# Altium PCB 海关全向控制器主控板电路V3.PcbDoc (part 1 of 3)
Units mil, origin at the board's own origin, x right, y up, seen from the top; angles counter-clockwise.
Board outline 7874.02 x 2362.2 mil, 2 copper layers (Top Layer, Bottom Layer), stack 42.17 mil thick; 192 components, 119 nets, 573 pads, 115 vias.
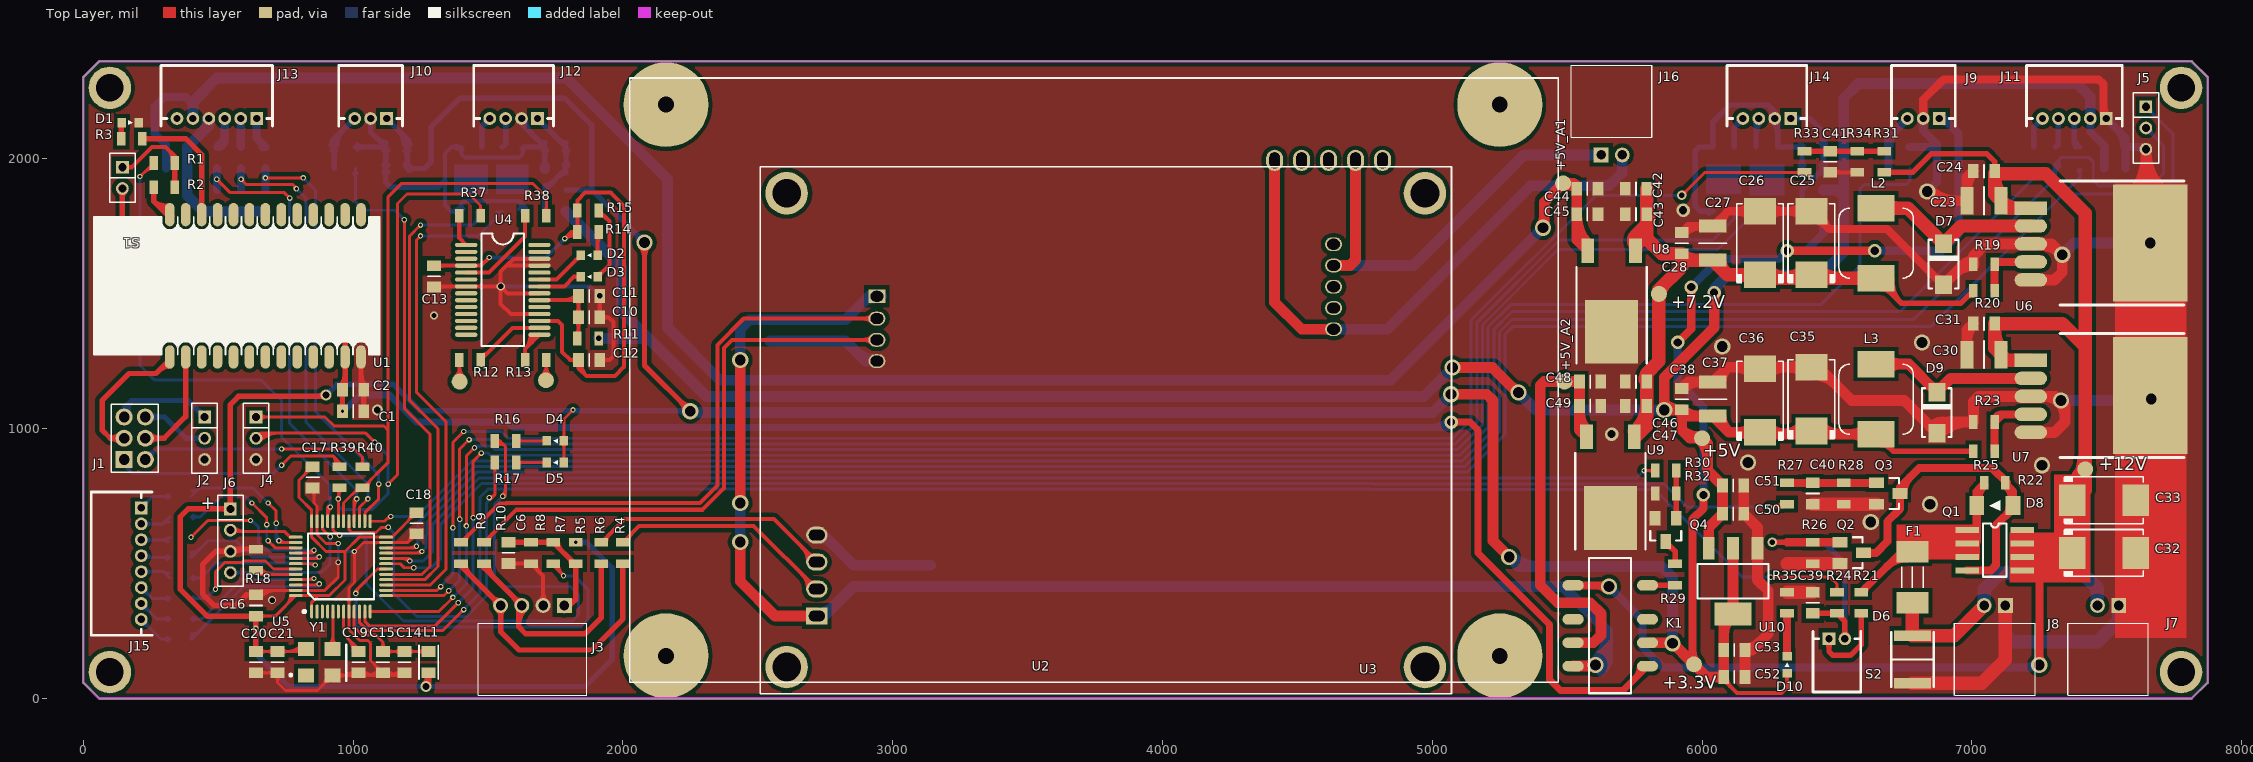
[diagram p0: Top Layer view]
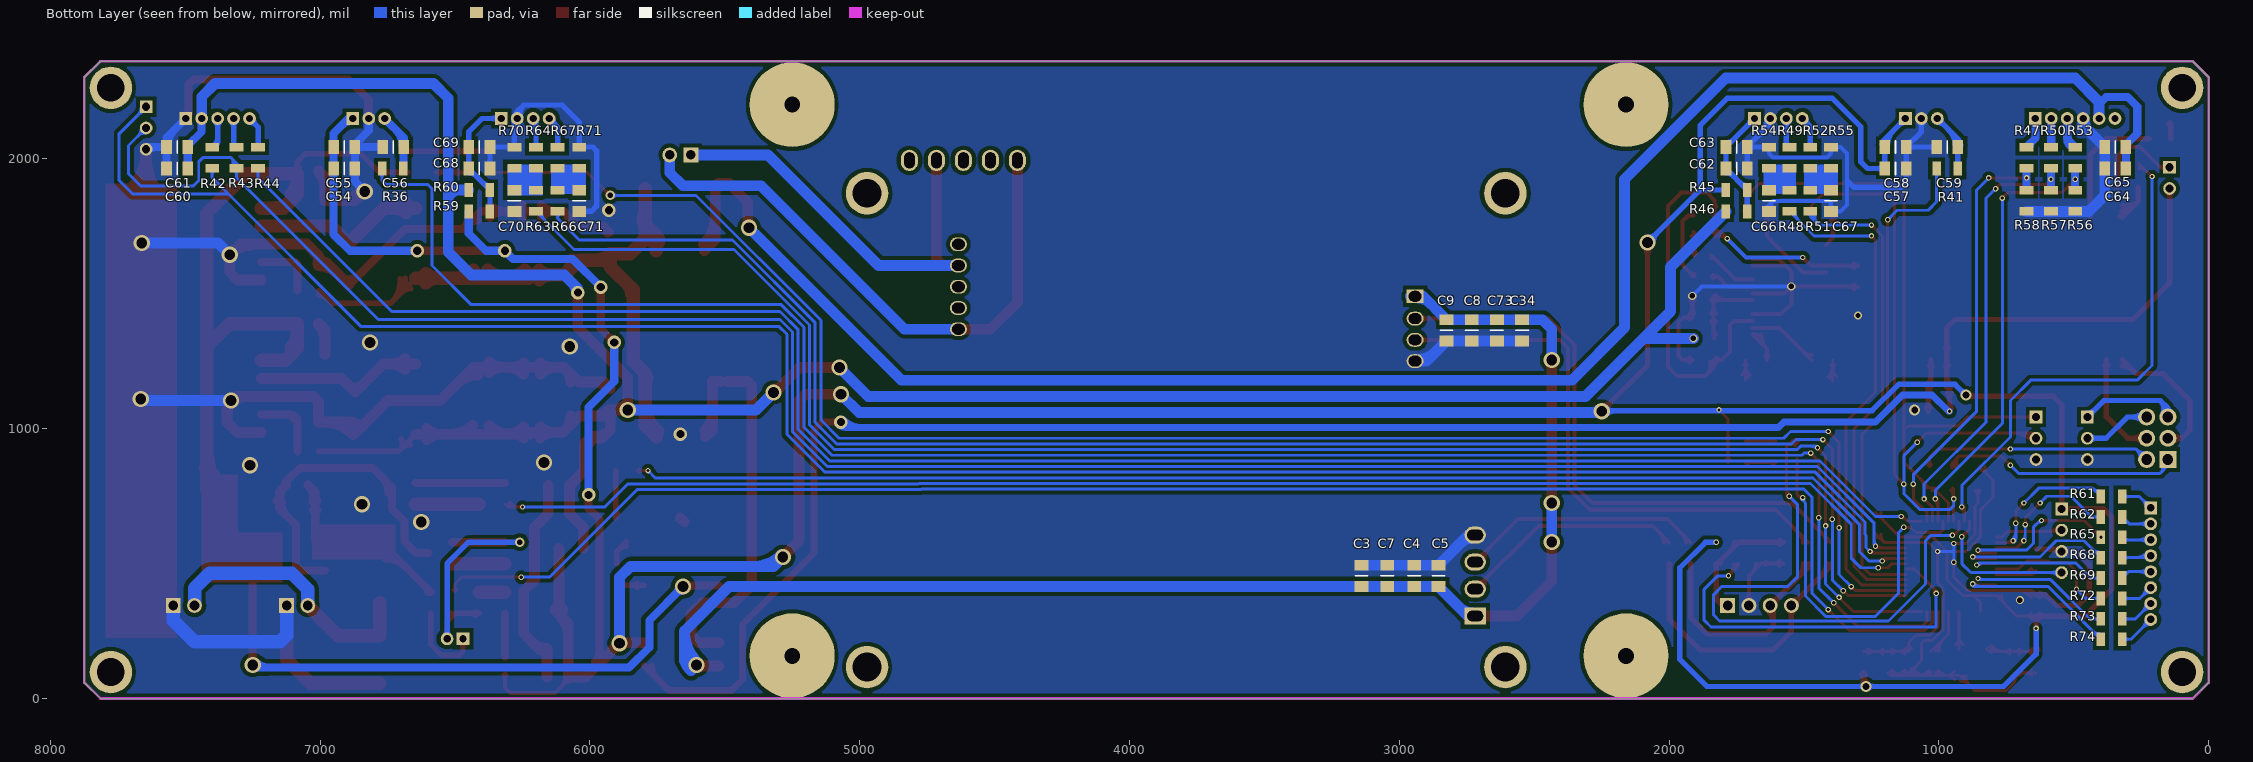
[diagram p1: Bottom Layer view, seen from below]
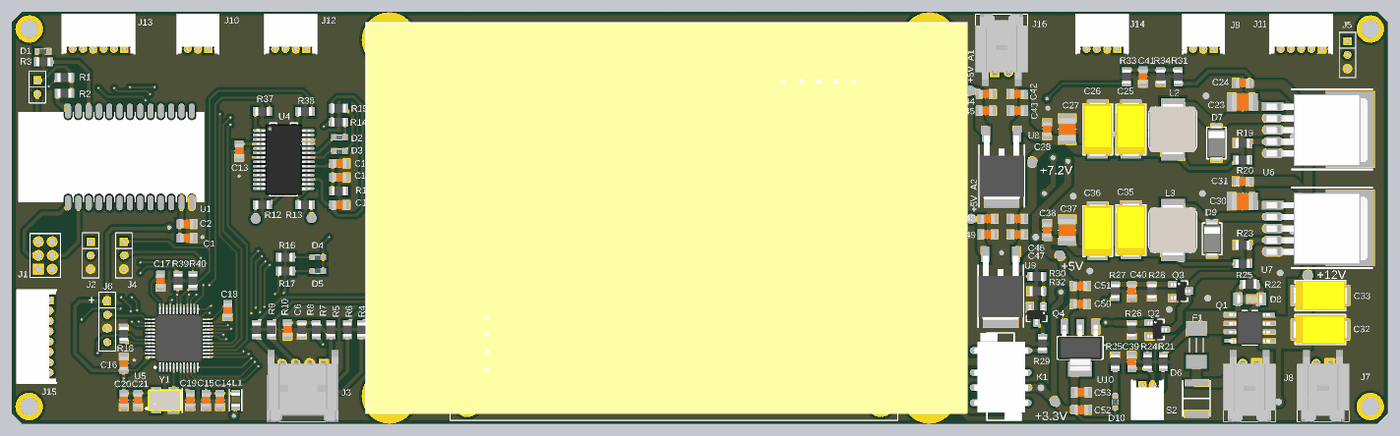
[diagram p4: 3D render of the assembled board from above, using the file's embedded part models]
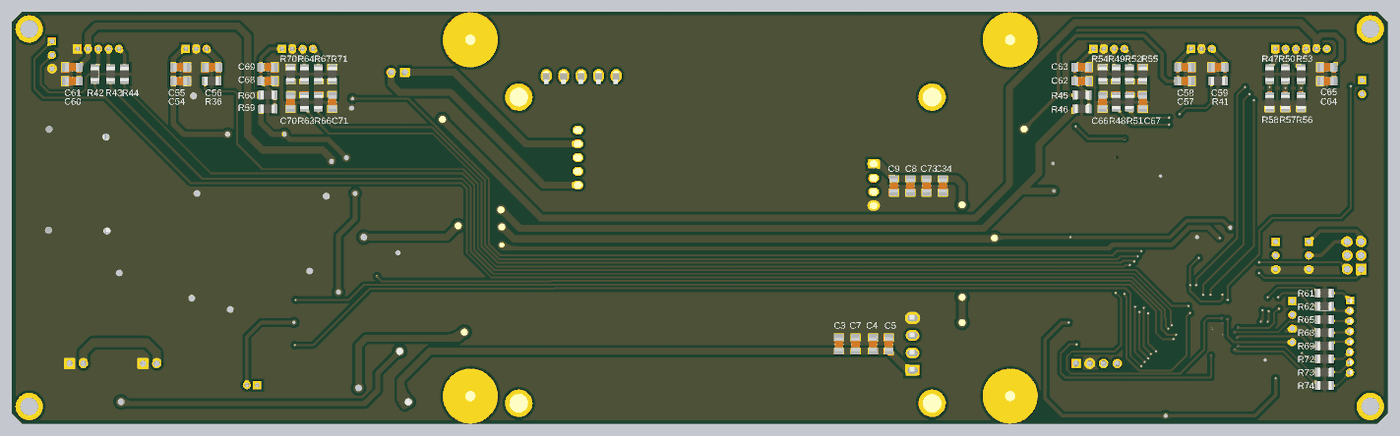
[diagram p5: 3D render of the assembled board from below, using the file's embedded part models]

## Layer stack, top to bottom
Top Solder: solder mask 0.4, Solder Resist, Dk 3.5
Top Layer: signal copper 1.4
Dielectric 1: dielectric 39.3701, FR-4, Dk 4.8
Bottom Layer: signal copper 1.4
Bottom Solder: solder mask 0.4, Solder Resist, Dk 3.5

## Board outline
0,59.06 0,2303.15 59.06,2362.2 7814.96,2362.2 7874.02,2303.15 7874.02,59.05 7814.96,0 59.06,0

## Design rules (kind name [scope] priority, off if disabled: settings)
Clearance [All] p1: gap=6
ComponentClearance [All] p1: gap=0 collisioncheckmode=3 verticalgap=0 showdistances=FALSE
DiffPairsRouting [All] p1: maxlimit=10 minlimit=10 mostfreqgap=10 toplayer_minwidth=15 toplayer_maxwidth=15 toplayer_prefwidth=15 bottomlayer_minwidth=15 bottomlayer_maxwidth=15 bottomlayer_prefwidth=15 maxuncoupledlength=500
Height [All] p1: minheight=0 maxheight=2000 prefheight=500
HoleSize [All] p1: absolutevalues=TRUE maxlimit=200 minlimit=1 maxpercent=80.000 minpercent=20.000
HoleToHoleClearance [All] p1: gap=6 allowstackedmicrovias=TRUE
MinimumSolderMaskSliver [All] p1: minsoldermaskwidth=0
PlaneConnect [All] p1: planeconnectstyle=Direct reliefexpansion=20 reliefentries=4 reliefconductorwidth=10 reliefairgap=10
PolygonConnect [All] p1: connectstyle=Direct reliefconductorwidth=10 reliefentries=4 polygonreliefangle="90 Angle" airgapwidth=10
RoutingVias [All] p1: holewidth=28 width=50 viastyle="Through Hole" minholewidth=8 minwidth=12 maxholewidth=200 maxwidth=300
SilkToSilkClearance [All] p1: silktosilkclearance=0
SilkToSolderMaskClearance [IsPad] p1: minsilkscreentomaskgap=0 clearancetoexposedcopper=TRUE
SolderMaskExpansion [All] p1: expansion=4
Width [All] p1: maxlimit=157.48 minlimit=10 preferedwidth=10
20 further rules are at their usual default settings.

## Classes and differential pairs
component class Designator: C23 C24 C25 C26 C27 C28 C30 C31 C32 C33 C35 C36 C37 C38 C39 C40 C41 C42 C43 C44 C45 C46 C47 C48 C49 C50 C51 C52 C53 D6 D7 D8 D9 D10 F1 J7 J8 K1 L2 L3 Q1 Q2 Q3 Q4 R19 R20 R21 R22 R23 R24 R25 R26 R27 R28 R29 R30 R31 R32 R33 R34 R35 S2 U6 U7 U8 U9 U10
component class 海关全向控制器主控板电路V3_系统管理: C54 C55 C56 C57 C58 C59 C60 C61 C62 C63 C64 C65 C66 C67 C68 C69 C70 C71 J9 J10 J11 J12 J13 J14 J15 R36 R37 R38 R39 R40 R41 R42 R43 R44 R45 R46 R47 R48 R49 R50 R51 R52 R53 R54 R55 R56 R57 R58 R59 R60 R61 R62 R63 R64 R65 R66 R67 R68 R69 R70 R71 R72 R73 R74
differential pair V2: +V2_P -V2_N
differential pair V1: +V1_P -V1_N

## Components (designator, comment, footprint, x,y, rotation, side; value= is the part's Value field where it differs from the comment)
C1 "10uF" C0805 1000,1065 r0 top
C2 "0.1uF" C0805 1000,1145 r180 top
C3 "10uF" C0805 3140,455 r90 bottom
C4 "1uF" C0805 2945,455 r90 bottom
C5 "0.1uF" C0805 2855,455 r270 bottom
C6 "0.1uF" C0805 1576,540 r270 top
C7 "10uF" C0805 3045,455 r90 bottom
C8 "1uF" C0805 2731.67,1365 r270 bottom
C9 "0.1uF" C0805 2825,1365 r90 bottom
C10 "10uF" C0805 1875,1413.29 r0 top
C11 "0.1uF" C0805 1875,1492.44 r180 top
C12 "0.1uF" C0805 1875,1255 r180 top
C13 "0.1uF" C0805 1300,1565 r270 top
C14 "10uF" C0805 1190.77,135 r90 top
C15 "0.1uF" C0805 1110.39,135 r270 top
C16 "0.1uF" C0805 640,345 r90 top
C17 "0.1uF" C0805 850,820 r270 top
C18 "0.1uF" C0805 1235,650 r270 top
C19 "0.1uF" C0805 1020,135 r270 top
C20 "10uF" C0805 640,135 r90 top
C21 "10uF" C0805 720,135 r90 top
C23 "22uF" C1210 7045,1845 r180 top
C24 "0.1uF" C0805 7045,1955 r0 top
C25 "100uF/25V" C7343 6405,1688.33 r90 top
C26 "100uF/25V" C7343 6215,1688.33 r90 top
C27 "22uF" C1210 6040,1688.33 r90 top
C28 "0.1uF" C0805 5925,1688.33 r270 top
C30 "22uF" C1210 7045,1275 r180 top
C31 "0.1uF" C0805 7045,1390 r0 top
C32 "100uF/25V" C7343 7490,540 r0 top
C33 "100uF/25V" C7343 7490,735 r0 top
C34 "10uF" C0805 2545,1365 r270 bottom
C35 "100uF/25V" C7343 6405,1110 r90 top
C36 "100uF/25V" C7343 6215,1105 r90 top
C37 "22uF" C1210 6040,1110 r90 top
C38 "0.1uF" C0805 5925,1110 r270 top
C39 "0.1uF" C0805 6410,355 r270 top
C40 "0.1uF" C0805 6410,760.02 r90 top
C41 "0.1uF" C0805 6475,1990 r90 top
C42 "10uF" C0805 5755,1890 r180 top
C43 "0.1uF" C0805 5755,1795 r0 top
C44 "10uF" C0805 5575,1890 r0 top
C45 "0.1uF" C0805 5575,1795 r180 top
C46 "10uF" C0805 5755,1175 r180 top
C47 "0.1uF" C0805 5755,1085 r0 top
C48 "10uF" C0805 5585,1175 r0 top
C49 "0.1uF" C0805 5585,1085 r180 top
C50 "10uF" C0805 6115,685 r0 top
C51 "0.1uF" C0805 6115,790 r180 top
C52 "10uF" C0805 6120,80 r0 top
C53 "0.1uF" C0805 6120,180 r180 top
C54 "10uF" C0805 6910.8,1964.79 r180 bottom
C55 "0.1uF" C0805 6910.8,2044.37 r180 bottom
C56 "0.1uF" C0805 6729.2,2044.37 r0 bottom
C57 "10uF" C0805 1160.8,1964.79 r180 bottom
C58 "0.1uF" C0805 1160.8,2044.37 r180 bottom
C59 "0.1uF" C0805 969.2,2044.37 r0 bottom
C60 "10uF" C0805 7530,1964.79 r0 bottom
C61 "0.1uF" C0805 7530,2044.37 r0 bottom
C62 "0.1uF" C0805 1750,1964.79 r0 bottom
C63 "10uF" C0805 1750,2044.37 r0 bottom
C64 "10uF" C0805 346.36,1964.79 r0 bottom
C65 "0.1uF" C0805 346.36,2044.37 r0 bottom
C66 "0.1uF" C0805 1630,1845 r270 bottom
C67 "0.1uF" C0805 1400,1845 r270 bottom
C68 "0.1uF" C0805 6410,1964.79 r0 bottom
C69 "10uF" C0805 6410,2044.37 r0 bottom
C70 "0.1uF" C0805 6280,1845 r270 bottom
C71 "0.1uF" C0805 6040,1845 r270 bottom
C73 "10uF" C0805 2638.33,1365 r270 bottom
D1 "LED" LED0603 175,2135 r0 top
D2 "LED" LED0603 1875,1642.86 r180 top
D3 "LED" LED0603 1875,1563.72 r180 top
D4 "LED" LED0603 1750,955 r180 top
D5 "LED" LED0603 1750,875 r180 top
D6 "BA301N" BA301N 6780,145 r270 top
D7 "SS14" SMA 6895,1610 r90 top
D8 "ZMM16" SOD-80-S 7085,715 r180 top
D9 "SS14" SMA 6870,1060 r90 top
D10 "LED" LED0603 6315,125 r90 top
F1 "5A不可恢复保险" F1808 6780,450 r90 top
J1 "Jack 2x3" Jk2*3-2.0 151.26,886.26 r90 top
J2 "Jack 1x3" Jk1*3-2.0 450,965 r270 top
J3 "Jack 1x4" 35363-0460 1665,345 r0 top
J4 "Jack 1x3" Jk1*3-2.0 640,965 r270 top
J5 "Jack 1x3" Jk1*3-2.0 7645,2115 r270 top
J6 "Jack 1x4" Jk1*4-2.0 545,585 r270 top
J7 "Jack 1x2" 35363-0260 7505,345 r0 top
J8 "Jack 1x2" 35363-0260 7085,345 r0 top
J9 "Jack 1x3" ZH-3AWD 6820,2150 r180 top
J10 "Jack 1x3" ZH-3AWD 1065,2150 r180 top
J11 "Jack 1x5" ZH-5AWD 7380,2150 r180 top locked
J12 "Jack 1x4" ZH-4AWD 1595,2150 r180 top
J13 "Jack 1x6" ZH-6AWD 495,2150 r180 top
J14 "Jack 1x4" ZH-4AWD 6240,2150 r180 top locked
J15 "Jack 1x8" ZH-8AWD 215,500 r270 top
J16 "Jack 1x2" 35363-0260 5665,2015 r180 top
K1 "G6K-2F-Y" G6K-2F-Y 5660,270 r270 top
L1 "1uH" L0805 1280,135 r90 top
L2 "33uH" L6.6*7.1mm 6645,1688.33 r270 top
L3 "33uH" L6.6*7.1mm 6645,1110 r270 top
Q1 "FDS4435" SO8 7085,550 r0 top
Q2 "S8050" SOT-23 6555,540 r270 top
Q3 "S8050" SOT-23 6690,760 r270 top
Q4 "S8050" SOT-23 5865,625 r180 top
R1 "1K" R0805 300,1985 r180 top
R2 "1K" R0805 300,1895 r180 top
R3 "1K" R0805 180,2075 r0 top
R4 "0R" R0805 2000,540 r90 top
R5 "1K" R0805 1825,540 r270 top
R6 "0R" R0805 1920,540 r90 top
R7 "1K" R0805 1742,540 r90 top
R8 "10K" R0805 1659,540 r270 top
R9 "0R" R0805 1400,540 r90 top
R10 "0R" R0805 1485,540 r90 top
R11 "NC" R0805 1871.06,1334.15 r0 top
R12 "0R" R0805 1432.95,1255 r180 top
R13 "0R" R0805 1677.05,1255 r0 top
R14 "1K" R0805 1871.06,1729.88 r0 top
R15 "1K" R0805 1871.06,1809.03 r0 top
R16 "1K" R0805 1565,955 r0 top
R17 "1K" R0805 1565,875 r0 top
R18 "100K" R0805 640,515 r270 top
R19 "2K" R0805 7045,1610 r180 top
R20 "10K" R0805 7045,1511.92 r0 top
R21 "500k" R0805 6590,355 r90 top
R22 "10k" R0805 7085,800 r180 top
R23 "3.3K" R0805 7045,1025 r180 top
R24 "1K" R0805 6500,355 r270 top
R25 "10K" R0805 7045,916.92 r0 top
R26 "200K" R0805 6410,540 r270 top
R27 "1K" R0805 6315,760.02 r90 top
R28 "10K" R0805 6525,760.02 r270 top
R29 "0R" R0805 5900,460 r270 top
R30 "1K" R0805 5865,845 r0 top
R31 "10K" R0805 6675,1990 r90 top
R32 "10K" R0805 5865,760 r180 top
R33 "1K" R0805 6380,1990 r90 top
R34 "1K" R0805 6575,1990 r90 top
R35 "1K" R0805 6315,355 r270 top
R36 "1K" R0805 6731.17,1964.79 r180 bottom
R37 "NC" R0805 1432.95,1790 r180 top
R38 "NC" R0805 1677.05,1790 r180 top
R39 "0R" R0805 950,820 r90 top
R40 "0R" R0805 1035,820 r90 top
R41 "1K" R0805 969.2,1964.79 r180 bottom
R42 "0R" R0805 7400,2005 r270 bottom
R43 "0R" R0805 7310,2005 r270 bottom
R44 "0R" R0805 7230,2005 r270 bottom
R45 "0R" R0805 1750,1885.21 r180 bottom
R46 "NC" R0805 1750,1805.63 r180 bottom
R47 "1K" R0805 675,2005 r270 bottom
R48 "1K" R0805 1553.33,1845 r270 bottom
R49 "1K" R0805 1553.33,2005 r90 bottom
R50 "1K" R0805 585,2005 r270 bottom
R51 "1K" R0805 1476.67,1845 r270 bottom
R52 "1K" R0805 1476.67,2005 r90 bottom
R53 "1K" R0805 495,2005 r270 bottom
R54 "NC" R0805 1630,2005 r90 bottom
R55 "NC" R0805 1400,2005 r270 bottom
R56 "10K" R0805 495,1845 r90 bottom
R57 "10K" R0805 585,1845 r90 bottom
R58 "10K" R0805 675,1845 r90 bottom
R59 "0R" R0805 6410,1805.63 r180 bottom
R60 "NC" R0805 6410,1885.21 r180 bottom
R61 "1K" R0805 360,749.03 r0 bottom
R62 "0R" R0805 360,673.45 r0 bottom
R63 "1K" R0805 6200,1845 r270 bottom
R64 "1K" R0805 6200,2005 r90 bottom
R65 "1K" R0805 360,597.88 r0 bottom
R66 "1K" R0805 6120,1845 r270 bottom
R67 "1K" R0805 6120,2005 r90 bottom
R68 "0R" R0805 360,522.3 r0 bottom
R69 "1K" R0805 360,446.73 r0 bottom
R70 "NC" R0805 6280,2005 r90 bottom
R71 "NC" R0805 6040,2005 r270 bottom
R72 "0R" R0805 360,371.15 r0 bottom
R73 "1K" R0805 360,295.58 r0 bottom
R74 "0R" R0805 360,220 r0 bottom
S1 "SW-PB" Jk1*2-2.0 145,1930 r270 top
S2 "SW-PB" ZH-2AWD 6500,221.45 r0 top locked
U1 "HC-05" HC-05 675,1530 r90 top
U2 "USB-AV" USB-AV 3705,1180 r180 top locked
U3 "miniUSB-AV" MINIUSB-AV 3790,995 r180 top locked
U4 "FT232RL" SSOP-28 1555,1515 r0 top
U5 "STM32F103CB" LQF48 955,490 r90 top locked
U6 "LM2596-ADJ" TO-263-5 7440,1685 r270 top locked
U7 "LM2596-ADJ" TO-263-5 7440,1120 r270 top locked
U8 "78M05" TO-252 5665,1510 r180 top
U9 "78M05" TO-252 5660,820 r180 top
U10 "LM1117-3.3" SOT-223 6115,435 r180 top
Y1 "XTAL 8MHz" XTAL5032 875,135 r0 top

## Footprints (in the part's own frame and the unit in brackets; to place one, negate y for a bottom-side part, rotate by r counter-clockwise, add the part's x,y. Pads: shape width x height; smd on the part's side, far side on the other; paste and mask are expansions set on the pad)
35363-0260 [mm]
  rect 1.4x1.4 hole 0.9: 1(1,0)
  round 1.4 hole 0.9: 2(-1,0)
  silkscreen extent -3.8,-8.46 3.8,-1.67, body extent -3.86,-8.52 3.84,1.98, height 5.75
35363-0460 [mm]
  rect 1.4x1.4 hole 0.9: 1(3,0)
  round 1.4 hole 0.9: 2(1,0) 3(-1,0) 4(-3,0)
  silkscreen extent -5.11,-8.46 5.1,-1.67, body extent -5.15,-8.52 5.15,1.98, height 5.75
BA301N [mm]
  rect 1x3.5 smd: 1(-2.25,0) 2(2.25,0)
  silkscreen extent -2.6,-2 2.6,2
C0805 [mm]
  rect 1x1.3 smd: 1(-1,0) 2(1,0)
  silkscreen extent 0,-0.6 0,0.6, body extent -1,-0.63 1,0.63, height 0.8
C1210 [mm]
  rect 1.2x2.6 smd: 1(-1.6,0) 2(1.6,0)
  silkscreen extent 0,-1.3 0,1.3, body extent -1.6,-1.25 1.6,1.25, height 0.95
C7343 [mm] "100uF/25V"
  rect 2.5x3 smd: 1(-3,0) 2(3,0)
  silkscreen extent -3.8,-2.2 3.7,2.2, body extent -3.87,-2.15 3.87,2.15, height 2.9
F1808 [mm]
  rect 2x3 smd: 1(-2.4,0) 2(2.4,0)
  silkscreen extent -1,-1 1,1
G6K-2F-Y [mm]
  oval 1x2 smd: 1(-3.8,-3.5) 2(-0.6,-3.5) 3(1.6,-3.5) 4(3.8,-3.5) 5(3.8,3.5) 6(1.6,3.5) 7(-0.6,3.5) 8(-3.8,3.5)
  silkscreen extent -6.37,-2.01 6.36,1.95, body extent -6.36,-3.83 6.44,3.97, height 5.4
HC-05 [mm] "HC-05 蓝牙串口通信模块"
  oval 2.2x0.9 smd: 1(-6.7,9) 2(-6.7,7.5) 3(-6.7,6) 4(-6.7,4.5) 5(-6.7,3) 6(-6.7,1.5) 7(-6.7,0) 8(-6.7,-1.5) 9(-6.7,-3) 10(-6.7,-4.5) 11(-6.7,-6) 12(-6.7,-7.5) 13(-6.7,-9) 22(6.7,-9) 23(6.7,-7.5) 24(6.7,-6) 25(6.7,-4.5) 26(6.7,-3) 27(6.7,-1.5) 28(6.7,0) 29(6.7,1.5) 30(6.7,3) 31(6.7,4.5) 32(6.7,6) 33(6.7,7.5) 34(6.7,9)
  silkscreen extent -6.5,-10.75 6.5,16.15
Jk1*2-2.0 [mm]
  rect 1.2x1.2 hole 0.762: 1(-1,0)
  round 1.2 hole 0.762: 2(1,0)
  silkscreen extent -2.3,-1.2 2.3,1.2
Jk1*3-2.0 [mm]
  rect 1.2x1.2 hole 0.762: 1(-2,0)
  round 1.2 hole 0.762: 2(0,0) 3(2,0)
  silkscreen extent -3.3,-1.2 3.3,1.2
Jk1*4-2.0 [mm] "4P，直插，2.0mm间距，排母"
  rect 1.2x1.2 hole 0.762: 1(-3,0)
  round 1.2 hole 0.762: 2(-1,0) 3(1,0) 4(3,0)
  silkscreen extent -4.3,-1.2 4.3,1.2, body extent -4.25,-1.22 4.25,1.18, height 4.3
Jk2*3-2.0 [mm] "2.0双排座2*3-直"
  rect 1.6x1.6 hole 1: 1(0,0)
  round 1.6 hole 1: 2(0,-2) 3(2,0) 4(2,-2) 5(4,0) 6(4,-2)
  silkscreen extent -1.2,-3.2 5.2,1.2, body extent -1.03,-3.26 4.98,1.25, height 4.4
L6.6*7.1mm [mm] "AMPI0630ED"
  rect 2.5x3.5 smd: 1(-3.3,0) 2(3.3,0)
  silkscreen extent -3.3,-3.5 3.3,3.5, body extent -3.65,-3.35 3.65,3.35, height 3.13
L0805 [mm]
  rect 1x1.3 smd: 1(-1,0) 2(1,0)
  silkscreen extent -1.6,-0.9 1.6,0.9, body extent -0.95,-0.65 1.08,0.63, height 0.61
LED0603 [mm]
  rect 0.8x0.9 smd: 1(-0.8,0) 2(0.8,0)
  silkscreen extent -0.2,-0.2 0.2,0.2, body extent -0.8,-0.4 0.8,0.4, height 0.6
LQF48 [mm]
  oval 1.3x0.28 smd: 1(-4.25,2.75) 2(-4.25,2.25) 3(-4.25,1.75) 4(-4.25,1.25) 5(-4.25,0.75) 6(-4.25,0.25) 7(-4.25,-0.25) 8(-4.25,-0.75) 9(-4.25,-1.25) 10(-4.25,-1.75) 11(-4.25,-2.25) 12(-4.25,-2.75) 25(4.25,-2.75) 26(4.25,-2.25) 27(4.25,-1.75) 28(4.25,-1.25) 29(4.25,-0.75) 30(4.25,-0.25) 31(4.25,0.25) 32(4.25,0.75) 33(4.25,1.25) 34(4.25,1.75) 35(4.25,2.25) 36(4.25,2.75)
  oval 0.28x1.3 smd: 13(-2.75,-4.25) 14(-2.25,-4.25) 15(-1.75,-4.25) 16(-1.25,-4.25) 17(-0.75,-4.25) 18(-0.25,-4.25) 19(0.25,-4.25) 20(0.75,-4.25) 21(1.25,-4.25) 22(1.75,-4.25) 23(2.25,-4.25) 24(2.75,-4.25) 37(2.75,4.25) 38(2.25,4.25) 39(1.75,4.25) 40(1.25,4.25) 41(0.75,4.25) 42(0.25,4.25) 43(-0.25,4.25) 44(-0.75,4.25) 45(-1.25,4.25) 46(-1.75,4.25) 47(-2.25,4.25) 48(-2.75,4.25)
  silkscreen extent -4.37,-3.1 3.1,3.57, body extent -4.49,-4.5 4.51,4.5, height 1.8
MINIUSB-AV [mm]
  rect 1.6x1.3 hole 1 slot 1.2 at 0 deg: 1(21.55,-12.6)
  oval 1.6x1.3 hole 1 slot 1.2 at 0 deg: 2(21.55,-10.5) 3(21.55,-8.5) 4(21.55,-6.5) 5(-21.45,-17.5) 6(-21.45,-15.5) 7(-21.45,-13.5) 8(-21.45,-11.5) 9(-21.45,-9.5)
  round 4 hole 2.7: ""(-30.05,-22.3) ""(-30.05,22.3) ""(30.05,-22.3) ""(30.05,22.3)
  silkscreen extent -32.55,-24.8 32.55,24.8
R0805 [mm]
  rect 0.8x1.3 smd: 1(-1,0) 2(1,0)
  body extent -1,-0.63 1,0.63, height 0.47
SMA [mm]
  rect 1.75x1.6 smd: 1(-1.925,0) 2(1.925,0)
  silkscreen extent -2.3,-1.5 2.3,1.5, body extent -2.6,-1.33 2.6,1.33, height 2.15
SO8 [mm]
  rect 2.2x0.6 smd: 1(-2.6,1.905) 2(-2.6,0.635) 3(-2.6,-0.635) 4(-2.6,-1.905) 5(2.6,-1.905) 6(2.6,-0.635) 7(2.6,0.635) 8(2.6,1.905)
  silkscreen extent -1.1,-2.5 1.1,2.5, body extent -2.97,-2.46 2.97,2.44, height 1.4
SOD-80-S [mm]
  rect 1.4x1.8 smd: 1(-1.7,0) 2(1.7,0)
  silkscreen extent -0.5,-0.5 0.5,0.5, body extent -1.85,-0.79 1.85,0.81, height 1.6
SOT-23 [mm]
  rect 1x1.4 smd: 1(-1,-1.1) 2(1,-1.1) 3(0,1.1)
  silkscreen extent -1.47,0.13 1.45,1, body extent -1.45,-1.4 1.45,1.4, height 1.3
SOT-223 [mm]
  rect 1.1x2.15 smd: 1(-2.3,-3.1) 2(0,-3.1) 3(2.3,-3.1)
  rect 3.5x2.15 smd: 4(0,3.1)
  silkscreen extent -3.35,-1.63 3.35,1.63, body extent -3.15,-3.3 3.15,3.3, height 1.8
SSOP-28 [mm]
  oval 2.1x0.4 smd: 1(-3.45,4.225) 2(-3.45,3.575) 3(-3.45,2.925) 4(-3.45,2.275) 5(-3.45,1.625) 6(-3.45,0.975) 7(-3.45,0.325) 8(-3.45,-0.325) 9(-3.45,-0.975) 10(-3.45,-1.625) 11(-3.45,-2.275) 12(-3.45,-2.925) 13(-3.45,-3.575) 14(-3.45,-4.225) 15(3.45,-4.225) 16(3.45,-3.575) 17(3.45,-2.925) 18(3.45,-2.275) 19(3.45,-1.625) 20(3.45,-0.975) 21(3.45,-0.325) 22(3.45,0.325) 23(3.45,0.975) 24(3.45,1.625) 25(3.45,2.275) 26(3.45,2.925) 27(3.45,3.575) 28(3.45,4.225)
  silkscreen extent -2,-5.3 2,5.3, body extent -3.88,-5.16 3.88,5.17, height 2.15
TO-252 [mm]
  rect 1.2x2.28 smd: 1(-2.25,-3.816) 3(2.25,-3.816)
  rect 5x6 smd: 2(0,3.816)
  silkscreen extent -3.3,-2.27 3.3,6.78, body extent -3.25,-3.62 3.25,5.68, height 2.3
TO-263-5 [mil]
  rect 433.07x275.59 smd: 0(-3.33,221.44)
  rect 50x120 smd: 1(-133.33,-221.44)
  oval 50x120 smd: 2(-66.67,-221.44) 3(0,-221.44) 4(66.67,-221.44) 5(133.33,-221.44)
  silkscreen extent -233,-114 227,346, body extent -204,-258 207,321, height 177
USB-AV [mm]
  rect 2x1.6 hole 1 slot 1.5 at 0 deg: 1(25.05,22.2)
  oval 2x1.6 hole 1 slot 1.5 at 0 deg: 2(25.05,19.66) 3(25.05,17.12) 4(25.05,14.58)
  oval 1.6x2 hole 1 slot 1.5 at 90 deg: 5(-18.054,-20.701) 6(-20.594,-20.701) 7(-23.134,-20.701) 8(-25.674,-20.701) 9(-28.214,-20.701)
  round 8 hole 1.5: ""(-39.25,25.95) ""(-39.25,-25.95) ""(39.25,25.95) ""(39.25,-25.95)
  silkscreen extent -44.75,-28.45 42.65,28.45, body extent -44.83,-28.37 42.57,28.53, height 5
XTAL5032 [mm]
  rect 1.5x1.3 smd: 1(-1.25,-1.25) 2(1.25,-1.25) 3(1.25,1.25) 4(-1.25,1.25)
  silkscreen extent -2.81,-1.78 2.54,1.65, body extent -2.5,-1.6 2.5,1.6, height 1.2
ZH-2AWD [mm] "1.5mm，2P，卧插"
  rect 1.2x1.2 hole 0.7: 1(-0.75,0)
  round 1.2 hole 0.7: 2(0.75,0)
  silkscreen extent -2.25,-5 2.25,0.7, body extent -2.25,-5.05 2.25,0.65, height 3.95
ZH-3AWD [mm] "1.5mm，3P，卧插"
  rect 1.2x1.2 hole 0.7: 1(-1.5,0)
  round 1.2 hole 0.7: 2(0,0) 3(1.5,0)
  silkscreen extent -3,-5 3,0.7, body extent -3,-5.05 3,0.65, height 3.95
ZH-4AWD [mm] "1.5mm，4P，卧插"
  rect 1.2x1.2 hole 0.7: 1(-2.25,0)
  round 1.2 hole 0.7: 2(-0.75,0) 3(0.75,0) 4(2.25,0)
  silkscreen extent -3.75,-5 3.75,0.7, body extent -3.75,-5.05 3.75,0.65, height 3.95
ZH-5AWD [mm] "1.5mm，5P，卧插"
  rect 1.2x1.2 hole 0.7: 1(-3,0)
  round 1.2 hole 0.7: 2(-1.5,0) 3(0,0) 4(1.5,0) 5(3,0)
  silkscreen extent -4.5,-5 4.5,0.7, body extent -4.5,-5.05 4.5,0.65, height 3.95
ZH-6AWD [mm] "1.5mm，6P，卧插"
  rect 1.2x1.2 hole 0.7: 1(-3.75,0)
  round 1.2 hole 0.7: 2(-2.25,0) 3(-0.75,0) 4(0.75,0) 5(2.25,0) 6(3.75,0)
  silkscreen extent -5.25,-5 5.25,0.7, body extent -5.25,-5.05 5.25,0.65, height 3.95
ZH-8AWD [mm] "1.5mm，8P，卧插"
  rect 1.2x1.2 hole 0.7: 1(-5.25,0)
  round 1.2 hole 0.7: 2(-3.75,0) 3(-2.25,0) 4(-0.75,0) 5(0.75,0) 6(2.25,0) 7(3.75,0) 8(5.25,0)
  silkscreen extent -6.75,-4.7 6.75,1, body extent -6.75,-4.75 6.75,0.95, height 3.95

## Part data
C1 C3 C4 C7 C8 C10 C23 C24 C27 C28 C30 C31 C34 C37 C38 C39 C40 C41 C42 C43 C44 C45 C46 C47 C48 C49 C50 C51 C52 C53 C73: library part CAP, "CAP"
C2 C5 C9 C11 C13: library part "Cap Semi"
C6 C12 C14 C15 C16 C17 C18 C19 C20 C21 C54 C55 C56 C57 C58 C59 C60 C61 C62 C63 C64 C65 C66 C67 C68 C69 C70 C71: library part Cap, "Capacitor"
C25 C26 C35 C36: library part ELECTRO, "Electrolytic Capacitor"
C32 C33: library part "Cap Poll"
D7 D9: library part Diode-Switch, "Silicon Epitaxial Planar Diodes"
D8: library part DIODE-ZENER, "Small Signal Zener Diodes"
F1: library part Fuse2
J1: "双排座"
J2 J3 J4 J5 J6 J7 J8 J9 J10 J11 J12 J13 J14 J15 J16: "插座"
L1 L2 L3: library part INDUCTOR, "INDUCTOR"
Q2 Q3: library part NPN, "NPN General Purpose Amplifier"
Q4: "NPN triode, 0.5A Max"
R1 R2 R3 R4 R5 R6 R7 R8 R9 R10 R11 R12 R13 R14 R15 R16 R17 R21 R22 R24 R26 R27 R28 R31 R33 R34 R35 R36 R37 R38 R39 R40 R41 R42 R43 R44 R45 R46 R47 R48 R49 R50 R51 R52 R53 R54 R55 R56 R57 R58 R59 R60 R61 R62 R63 R64 R65 R66 R67 R68 R69 R70 R71 R72 R73 R74: library part Res, "Resistor"
R18 R19 R20 R23 R25 R29 R30 R32: library part RES, "Resistor"
S1 S2: "Switch"
U5: library part STM32F103Cx
U6 U7: library part LM25x6-5, "LM2596-5;LM2576-5"
U10: library part LM1117, "800mA Linear Voltage Regulator"
Y1: library part XTAL

## Free pads (board coordinates)
  round 157.48 hole 102.36: ""(98.43,98.43) ""(98.43,2263.78) ""(7775.59,98.43) ""(7775.59,2263.78)
  round 59.06 smd: ""(1395,1175) ""(1715,1180) ""(5485,1910) ""(5490,1175) ""(5840,1500) ""(5970,127.01) ""(6000,965) ""(7420,850)

## Via types
v1: diameter 20, hole 12, Top Layer to Bottom Layer, tented both sides, 70 vias
v2: diameter 60, hole 40, Top Layer to Bottom Layer, tented both sides, 26 vias
v3: diameter 50, hole 30, Top Layer to Bottom Layer, tented both sides, 9 vias
v4: diameter 30, hole 20, Top Layer to Bottom Layer, tented both sides, 5 vias
v5: diameter 40, hole 25, Top Layer to Bottom Layer, tented both sides, 3 vias
v6: diameter 35, hole 20, Top Layer to Bottom Layer, tented both sides, 2 vias

## Nets (pads, with @x,y where several pads share a name; then routed paths per layer and width w, separated by ;. In a path a pad name is that pad's centre, name@x,y a point inside that pad or via, vN(x,y) a via of type N, cw(c..) or ccw(c..) an arc to the next point about the centre after c; other vN are vias at no path point)
3V3_OUT: C12.2 C13.1 R14.1 R15.1 U4.4 U4.17 | length 2421.2
  Top Layer w15: C13.1@1300,1604.37 1300.2,1604.57 U4.4@1419.17,1604.57 1474.57,1604.57 v1(1505,1635) ; C13.1@1314.52,1595.75 cw(c1335.8,1574.48) 1335.8,1604.57 ; C13.1@1314.52,1612.99 ccw(c1334.85,1633.31) 1334.85,1604.57 ; U4.17@1690.83,1399.84 1760.16,1399.84 1775,1385 1775,1285 1805,1255 C12.2@1835.63,1255 1835.63,1224.37 ; 1800.12,1720.12 cw(c1821.64,1698.59) R14.1@1834.56,1726.16 ; R14.1@1825.86,1724.05 ccw(c1811.78,1709.97) 1811.78,1729.88 ccw(c1811.78,1749.8) R14.1@1825.86,1735.72 ; R14.1@1825.86,1745.56 ccw(c1811.78,1759.64) 1831.69,1759.64 ccw(c1851.61,1759.64) R14.1@1837.53,1745.56 ; R15.1@1825.86,1793.36 cw(c1811.78,1779.28) 1831.69,1779.28 cw(c1851.61,1779.28) R15.1@1837.53,1793.36 ; R15.1@1825.86,1824.71 ccw(c1811.78,1838.79) 1831.69,1838.79 ccw(c1851.61,1838.79) R15.1@1837.53,1824.71 ; C12.2@1827.01,1246.38 ccw(c1806.21,1225.58) 1806.21,1255 ccw(c1806.21,1284.42) C12.2@1827.01,1263.62 ; C12.2@1828.21,1239.43 cw(c1816.64,1224.37) 1835.63,1224.37 ; R14.1@1828.19,1712.57 ccw(c1811.99,1678.01) v1(1785,1705) 1809.88,1729.88 R14.1@1831.69,1729.88 R15.1@1831.69,1809.03 1831.69,1846.69 1860,1875 1955,1875 2005,1825 2005,1230 1970,1195 1865,1195 ; C12.2@1832.84,1249.5 ccw(c1871.6,1243.8) 1843.9,1216.1 ; C12.2@1843.05,1239.43 ccw(c1854.62,1224.37) 1835.63,1224.37 ; C12.2@1847.68,1247.32 ccw(c1908.38,1238.38) 1865,1195 ; 1835.63,1224.37 1865,1195
  Bottom Layer w15: v1(1505,1635) 1715,1635 v1(1785,1705)
5V_A1: C44.1 C45.2 C64.1 C65.1 J13.5 pad.@5485,1910 U8.3 | length 7373.9
  Top Layer w40: v2@5402.93,1752.07 ccw(c5373.79,1781.21) 5415,1781.21 ; v2@5415,1745 5415,1840 pad.@5485,1910 5515.63,1910 ; pad.@5488.1,1900.99 cw(c5503.06,1857.44) C44.1@5535.63,1890 ; pad.@5489.82,1901.78 cw(c5508.82,1869.44) C44.1@5518.52,1905.67 ; pad.@5502.36,1910 cw(c5502.36,1862.64) C44.1@5535.85,1896.13 ; C45.2@5535.63,1788.71 ccw(c5683.63,1788.71) U8.3@5578.98,1684.06 ; C44.1@5535.92,1896.02 ccw(c5515.63,1888.28) 5515.63,1910 ; U8.3@5576.27,1685.12 cw(c5574.14,1739.53) 5535.63,1701.02 ; U8.3@5576.42,1660.24 5535.63,1701.02 ; 5515.63,1910 C44.1@5535.63,1890 ; 5535.63,1701.02 C45.2@5535.63,1795 C44.1@5535.63,1890
  Bottom Layer w30: C64.1@306.99,1964.79 C65.1@306.99,2044.37 306.99,2053.01 265,2095 265,2195 300,2230 380,2230 406.42,2203.58
  Bottom Layer w40: J13.5@406.42,2150 406.42,2203.58 406.42,2211.42 495,2300 1790,2300 2165,1925 2165,1375 2360,1180 4845,1180 v2(5410,1745)
5V_A2: C48.1 C49.2 K1.3 pad.@5490,1175 U9.3 | length 1621.2
  Top Layer w40: pad.@5490,1175 5415,1175 5400,1160 5400,420 5465,355 5585,355 5625,315 5625,235 5597.01,207.01 K1.3@5522.2,207.01 ; pad.@5515,1175 C48.1@5545.63,1175 C49.2@5545.63,1085 5545.63,996.02 U9.3@5571.42,970.24 ; C49.2@5545.63,1062.5 ccw(c5642.42,1062.5) U9.3@5573.98,994.06
+3.3V: C16.1 C17.1 C18.1 C20.2 C21.2 C52.1 C53.2 C54.1 C55.1 C57.1 C58.1 D4.1 D5.1 D10.1 J6.1 J9.1 J10.1 K1.6 L1.1 pad.@5970,127.01 R5.1 R45.1 R59.1 U5.1 U5.24 U5.36 U5.48 U10.2 U10.4 Y1.4 | length 20352.9
  Top Layer w11: C20.2@640,174.37 C21.2@720,174.37 815.95,174.37 Y1.4@825.79,184.21 ; C16.1@640,305.63 711.57,305.63 U5.48@787.68,381.73 871.73,381.73 ; C20.2@655.94,164.34 cw(c680.15,140.12) 680.15,174.37 cw(c680.15,208.62) C20.2@655.94,184.4 ; C16.1@655.94,295.6 cw(c680.15,271.38) 680.15,305.63 cw(c680.15,339.88) C16.1@655.94,315.66 ; C21.2@704.06,164.34 ccw(c679.85,140.12) 679.85,174.37 ccw(c679.85,208.62) C21.2@704.06,184.4 ; C21.2@735.94,164.34 cw(c760.15,140.12) 760.15,174.37 cw(c760.15,208.62) C21.2@735.94,184.4 ; 749.59,174.37 ccw(c749.59,256.48) Y1.4@807.64,198.42 ; 753.38,347.44 ccw(c719.08,381.73) U5.48@767.59,381.73 ; 772.16,366.21 ccw(c756.64,381.73) U5.48@778.59,381.73 ; 776.14,174.37 ccw(c776.14,229.92) Y1.4@815.42,190.64 ; Y1.4@797.11,174.37 cw(c797.11,159.47) Y1.4@807.64,170.01 ; 815.7,825.07 ccw(c781.41,859.37) C17.1@829.91,859.37 ; 829.96,839.33 cw(c844.09,825.2) C17.1@844.09,845.18 ; U5.1@846.73,322.68 846.73,356.73 871.73,381.73 ; C17.1@850,859.37 800,809.37 800,745 846.73,698.27 U5.36@846.73,657.32 846.73,598.27 900,545 970,545 ; 1200.7,655.07 ccw(c1166.41,689.37) C18.1@1214.91,689.37 ; 1214.96,669.33 cw(c1229.09,655.2) C18.1@1229.09,675.18 ; C18.1@1235,689.37 1143.9,598.27 U5.24@1122.32,598.27 1023.27,598.27 970,545 ; D5.1@1774.25,884.21 ccw(c1756.76,901.71) 1781.5,901.71 ccw(c1806.24,901.71) D5.1@1788.74,884.21 ; D4.1@1774.25,945.79 cw(c1756.76,928.29) 1781.5,928.29 cw(c1806.24,928.29) D4.1@1788.74,945.79 ; D4.1@1774.25,964.21 ccw(c1756.76,981.71) 1781.5,981.71 ccw(c1806.24,981.71) D4.1@1788.74,964.21 ; D5.1@1781.5,875 D4.1@1781.5,955 1781.5,1036.5 v1(1815,1070) ; v1@1810.5,1070 cw(c1799.64,1070) 1807.32,1062.32 cw(c1815,1054.64) v1@1815,1065.5 ; 871.73,381.73 911.73,381.73 970,440 970,545
  Top Layer w15: C52.1@6080.63,61.91 cw(c6080.63,43.9) C52.1@6093.37,56.63 ; C52.1@6080.63,80 6080.63,69.37 6130,20 6295,20 6315,40 D10.1@6315,93.5 ; C52.1@6092.82,74.09 ccw(c6133.64,74.09) 6104.77,45.23 ; D10.1@6309.17,87.67 cw(c6295.09,73.59) 6315,73.59 cw(c6334.91,73.59) D10.1@6320.83,87.67
  Top Layer w20: J6.1@535.37,693.48 ccw(c512.11,670.22) 512.11,703.11 ccw(c512.11,736) 535.37,712.74 ccw(c512.11,736) 545,736 ccw(c577.89,736) J6.1@554.63,712.74 ; C16.1@627.25,298.78 ccw(c610.71,282.25) 610.71,305.63 ccw(c610.71,329.01) C16.1@627.25,312.48 ; C20.2@633.15,181.22 ccw(c616.62,197.75) 640,197.75 ccw(c663.38,197.75) C20.2@646.85,181.22 ; C16.1@633.15,298.78 cw(c616.62,282.25) 640,282.25 cw(c663.38,282.25) C16.1@646.85,298.78 ; C20.2@640,174.37 v1(640,260) C16.1@640,305.63 459.37,305.63 360,405 360,675 388.11,703.11 J6.1@545,703.11 545,1090 575,1120 895,1120 v5(900,1125) ; 863.79,1120 ccw(c863.79,1161.21) v5@892.93,1132.07 ; v5@1262.93,52.07 ccw(c1221.72,93.28) L1.1@1280,93.28 ; v5(1270,45) 1280,55 L1.1@1280,95.63 ; L1.1@1273.15,88.78 cw(c1256.62,72.25) 1280,72.25 cw(c1303.38,72.25) L1.1@1286.85,88.78 ; v2@2065.86,1675.86 cw(c2031.72,1641.72) 2080,1641.72 cw(c2128.28,1641.72) v2@2094.14,1675.86 ; v2(2080,1690) 2080,1235 v2(2250,1065) ; v2@2230,1065 ccw(c2181.72,1065) 2215.86,1099.14 ccw(c2250,1133.28) v2@2250,1085
  Top Layer w30: v3(5910,1320) 5960,1370 v3(5960,1525) ; 5965,174.15 ccw(c6017.14,174.15) pad.@5980.27,137.28 ; pad.@5970,127.01 5965,132.01 5965,665 6005,705 v3(6005,755) ; v3(6315,1660) v3(6640,1660)
  Top Layer w40: v2(5070,1128.33) 5201.67,1128.33 5225,1105 5225,585 v2(5285,525) ; K1.6@5797.8,207.01 v2@5890,207.01 ; v2(5890,205) v2@5890,207.01 ; pad.@5965,132.01 v2@5890,207.01 ; pad.@5970,127.01 6017.01,80 C52.1@6080.63,80 6080.63,278.58 U10.4@6115,312.95 U10.2@6115,557.05 ; 6080.63,240.24 cw(c6161.14,240.24) U10.4@6104.21,297.17 ; U10.4@6099.22,328.74 ccw(c6061.11,366.85) 6115,366.85 ccw(c6168.89,366.84) U10.4@6130.78,328.74
  Bottom Layer w20: v1(640,260) 640,165 760,45 v5(1270,45) 1860,45 1960,145 1960,485 1865.63,579.37 v1(1825,579.37) ; v5(900,1125) 940,1165 1150,1165 1247.5,1067.5 2252.5,1067.5 v2@2260,1060 ; v5@900,1135 ccw(c900,1159.14) 917.07,1142.07 ccw(c934.14,1125) v5@910,1125 ; J10.1@1124.06,2136.38 cw(c1124.06,2103.49) 1147.31,2126.75 cw(c1170.56,2150) J10.1@1137.68,2150 ; J10.1@1124.06,2150 1200.17,2073.88 C58.1@1200.17,2044.37 C57.1@1200.17,1964.79 1264.79,1964.79 1290,1990 1290,2120 1395,2225 1785,2225 1885,2125 1885,1885 ; 1166.95,2107.11 cw(c1110.12,2050.28) C58.1@1190.49,2050.28 ; C57.1@1193.32,1977.54 ccw(c1176.79,1994.08) 1200.17,1994.08 ccw(c1223.55,1994.08) C57.1@1207.02,1977.54 ; C58.1@1193.32,2031.62 cw(c1176.79,2015.08) 1200.17,2015.08 cw(c1223.55,2015.08) C58.1@1207.02,2031.62 ; C58.1@1193.32,2057.12 ccw(c1176.79,2073.66) 1200.17,2073.66 ccw(c1223.55,2073.66) C58.1@1207.02,2057.12 ; 1201.09,2072.97 cw(c1178.4,2050.28) C58.1@1210.49,2050.28 ; C57.1@1207.02,1957.94 cw(c1223.55,1941.41) 1223.55,1964.79 cw(c1223.55,1988.17) C57.1@1207.02,1971.64 ; v5@1262.93,37.93 ccw(c1245.86,20.86) 1245.86,45 ccw(c1245.86,69.14) v5@1262.93,52.07 ; v5@1277.07,37.93 cw(c1294.14,20.86) 1294.14,45 cw(c1294.14,69.14) v5@1277.07,52.07 ; R45.1@1789.37,1885.21 1884.79,1885.21 1885,1885 ; v2@2060,1690 ccw(c2011.72,1690) 2045.86,1724.14 ccw(c2080,1758.28) v2@2080,1710 ; v2(2080,1690) 1885,1885 ; 2195.68,1067.5 cw(c2195.68,1010.68) v2@2235.86,1050.86 ; 2207.75,1067.5 ccw(c2207.75,1107.25) v2@2235.86,1079.14
  Bottom Layer w30: v3(5910,1320) 5910,1175 6005,1080 v3(6005,755) ; v3(5960,1525) 6065,1630 6285,1630 v3(6315,1660) 6385,1660 6449.37,1724.37 R59.1@6449.37,1805.63 ; v3(6640,1660) 6890,1660 6950.17,1720.17 C54.1@6950.17,1964.79 C55.1@6950.17,2044.37 6950.17,2094.83 6895,2150 J9.1@6879.06,2150 ; J9.1@6879.06,2141.38 cw(c6879.06,2082.07) 6920.99,2124.01
  Bottom Layer w40: v2@2257.07,1072.07 ccw(c2286.21,1101.21) 2286.21,1060 ; v2@2260,1060 5001.67,1060 v2(5070,1128.33) ; v2(5285,525) 5320,490 5850,490 5890,450 v2(5890,205) ; v2@5292.07,532.07 ccw(c5393.64,633.64) 5393.64,490
+3.3V_A: C14.2 C15.1 L1.2 U5.9 | length 660.2
  Top Layer w11: U5.9@1004.21,322.68 1004.21,265.79 1035,235 1085,235 1110.39,209.61 C15.1@1110.39,174.37 L1.2@1280,174.37 ; C15.1@1100.36,184.4 ccw(c1076.14,208.62) 1110.39,208.62 ccw(c1144.63,208.62) C15.1@1120.42,184.4 ; C15.1@1126.32,164.34 cw(c1150.54,140.12) 1150.54,174.37 cw(c1150.54,208.62) C15.1@1126.32,184.4 ; C14.2@1174.84,164.34 ccw(c1150.62,140.12) 1150.62,174.37 ccw(c1150.62,208.62) C14.2@1174.84,184.4 ; C14.2@1206.71,164.34 cw(c1230.92,140.12) 1230.92,174.37 cw(c1230.92,208.62) C14.2@1206.71,184.4 ; L1.2@1264.06,164.34 ccw(c1239.85,140.12) 1239.85,174.37 ccw(c1239.85,208.62) L1.2@1264.06,184.4
+3.3VOUT: C1.1 C2.2 K1.5 S1.2 U1.12 | length 7747.8
  Top Layer w20: S1.2@135.37,1881 cw(c112.11,1857.74) 145,1857.74 cw(c177.89,1857.74) S1.2@154.63,1881 ; S1.2@145,1890.63 145,1540 280,1405 940,1405 970.28,1374.72 970.28,1154.65 C2.2@960.63,1145 v1(960.63,1065) ; C1.1@953.78,1077.75 ccw(c937.25,1094.29) 960.63,1094.29 ccw(c984.01,1094.29) C1.1@967.48,1077.75 ; C2.2@953.78,1132.25 cw(c937.25,1115.71) 960.63,1115.71 cw(c984.01,1115.71) C2.2@967.48,1132.25 ; C2.2@953.78,1157.75 ccw(c913.96,1197.57) 970.28,1197.57 ; U1.12@964.82,1235.17 cw(c951.65,1222) 970.28,1222 cw(c988.9,1222) U1.12@975.73,1235.17 ; U1.12@964.82,1297.27 ccw(c951.65,1310.44) 970.28,1310.44 ccw(c988.9,1310.44) U1.12@975.73,1297.27
  Top Layer w25: v3(5070,1025) 5140,1025 5170,995 5170,540 5435,275 5435,70 5475,30 5707.4,30 K1.5@5797.8,120.39 ; v3@5078.84,1016.16 cw(c5100.18,994.82) 5100.18,1025 cw(c5100.18,1055.18) v3@5078.84,1033.84 ; 5751.93,74.52 ccw(c5706.06,120.39) K1.5@5770.93,120.39
  Bottom Layer w25: v1(960.63,1065) 965,1065 1025,1125 1135,1125 1235,1025 1575,1025 1595,1005 5050,1005 v3(5070,1025) ; 4991.54,1005 ccw(c4991.54,1103.46) v3@5061.16,1033.84 ; 5051.89,1005 ccw(c5051.89,1043.11) v3@5078.84,1016.16
+5V: C35.1 C36.1 C37.1 C38.2 C50.1 C51.2 C60.1 C61.1 J11.2 L3.2 pad.@6000,965 R11.2 R25.1 R46.1 R60.1 U10.3 | length 10550
  Top Layer w20: L3.2@6645,980.08 6708.16,916.92 R25.1@7005.63,916.92 ; L3.2@6664.68,940.87 cw(c6664.68,893.72) 6698.02,927.06 ; L3.2@6700.12,963.29 ccw(c6737.03,945.81) 6708.15,916.93
  Top Layer w40: v2(5075,1226.67) 5223.33,1226.67 5315,1135 v2(5320,1135) ; 5294.39,1155.61 ccw(c5320,1181.21) v2@5320,1145 ; v2(5860,1070) v2@5860,1095 ; v2@5860.35,1094.65 ccw(c5919.09,1153.39) C38.2@5919.09,1070.31 ; C38.2@5930.68,1070.41 ccw(c5987.17,1126.9) 5987.17,1047.01 ; pad.@5993.26,958.26 cw(c5928.71,893.71) 6020,893.71 ; pad.@5997.82,974.27 cw(c5980.02,1050.01) 5925,995 ; U10.3@6024.45,557.05 6024.45,633.82 C50.1@6075.63,685 C51.2@6075.63,790 6020,845.63 6020,945 pad.@6000,965 5955,965 5925,995 ; v3(6045,1505) 6045,1375 5860,1190 v2@5860,1095 ; C37.1@6071.18,1047.01 ccw(c6146.46,1047.01) 6093.23,993.78 ; C36.1@6184.5,966.23 ccw(c6134.63,916.36) 6134.63,986.89 ccw(c6134.63,1057.42) C36.1@6184.5,1007.55 ; C36.1@6245.5,966.23 cw(c6278.92,932.81) 6278.92,980.08 ; C36.1@6245.5,1007.55 ccw(c6311.81,1073.86) 6311.81,980.08 ; 6296.12,980.08 ccw(c6296.12,1090.93) C35.1@6374.5,1012.55 ; C35.1@6435.5,1012.55 ccw(c6513.88,1090.93) 6513.88,980.08 ; L3.2@6604.66,959.42 ccw(c6554.79,909.55) 6554.79,980.08 ccw(c6554.79,1050.6) L3.2@6604.66,1000.74 ; L3.2@6645,980.08 6221.81,980.08 C36.1@6215,986.89 6100.12,986.89 C37.1@6040,1047.01 6015,1047.01 5948.62,1047.01 C38.2@5925,1070.63 ; v2@5860,1095 5885,1070 5924.37,1070 C38.2@5925,1070.63 ; 5925,995 C38.2@5925,1070.63
  Bottom Layer w30: J11.2@7439.06,2150 7439.06,2100.94 7490.63,2049.37 C61.1@7490.63,2044.37 C60.1@7490.63,1964.79
  Bottom Layer w40: R46.1@1789.37,1805.63 1995,1600 1995,1435 2095,1335 ; v4(1910,1335) 2095,1335 ; v2(5075,1226.67) 4968.33,1120 2310,1120 2095,1335 ; v2(5320,1135) 5385,1070 v2(5860,1070) ; v3(6045,1505) 6045,1520 6095,1570 6440,1570 6525,1655 6525,1860 ; v3@6050,1505 cw(c6098.28,1505) 6064.14,1539.14 ; R60.1@6449.37,1885.21 6499.79,1885.21 6525,1860 ; J11.2@7439.06,2150 7439.06,2230.94 7390,2280 6580,2280 6525,2225 6525,1860
+5VOUT: C3.1 C4.1 C5.2 C7.1 C8.1 C9.2 C34.1 C73.1 K1.4 U2.1 U3.1 | length 5520.6
  Top Layer w40: v2(2435,580) 2435,435 2564.02,305.98 U2.1@2718.78,305.98 ; v2(2435,725) v2(2435,1255) ; K1.4@5522.2,120.39 5600.39,120.39 v2(5605,125) ; 5569.74,120.39 ccw(c5569.74,160.26) v2@5597.93,132.07
  Bottom Layer w40: v2(2435,580) v2(2435,725) ; v2(2435,1255) 2435,1370 2469.37,1404.37 C34.1@2545,1404.37 C73.1@2638.33,1404.37 C8.1@2731.67,1404.37 C9.2@2825,1404.37 2911.69,1491.06 U3.1@2941.57,1491.06 U3.1@2958.31,1491.06 ; U2.1@2718.78,305.98 2745.35,305.98 C5.2@2855,415.63 C4.1@2945,415.63 C7.1@3045,415.63 C3.1@3140,415.63 5484.37,415.63 5650,250 ; U2.1@2726.65,317.48 ccw(c2726.65,390.38) 2778.2,338.83 ; 2885.2,1464.57 cw(c2935.67,1414.09) U3.1@2935.67,1485.47 ; v2@5598.24,132.37 ccw(c5490.47,249.99) 5650,249.99 ; v2(5605,125) 5635,125 5650,140 ; v2@5609.65,133.86 ccw(c5625.65,164.35) 5650,140 ; 5625.27,102.88 ccw(c5573.76,159.09) 5650,159.09 ; 5650,140 5650,250